# Altium PCB placa_asier_v1.PcbDoc
Units mm, origin at the board's own origin, x right, y up, seen from the top; angles counter-clockwise.
Board outline 38.6 x 33.2 mm, 2 copper layers (Top Layer, Bottom Layer); 40 components, 24 nets, 107 pads, 7 vias.
Unrouted connection lines stored in the file: 3.
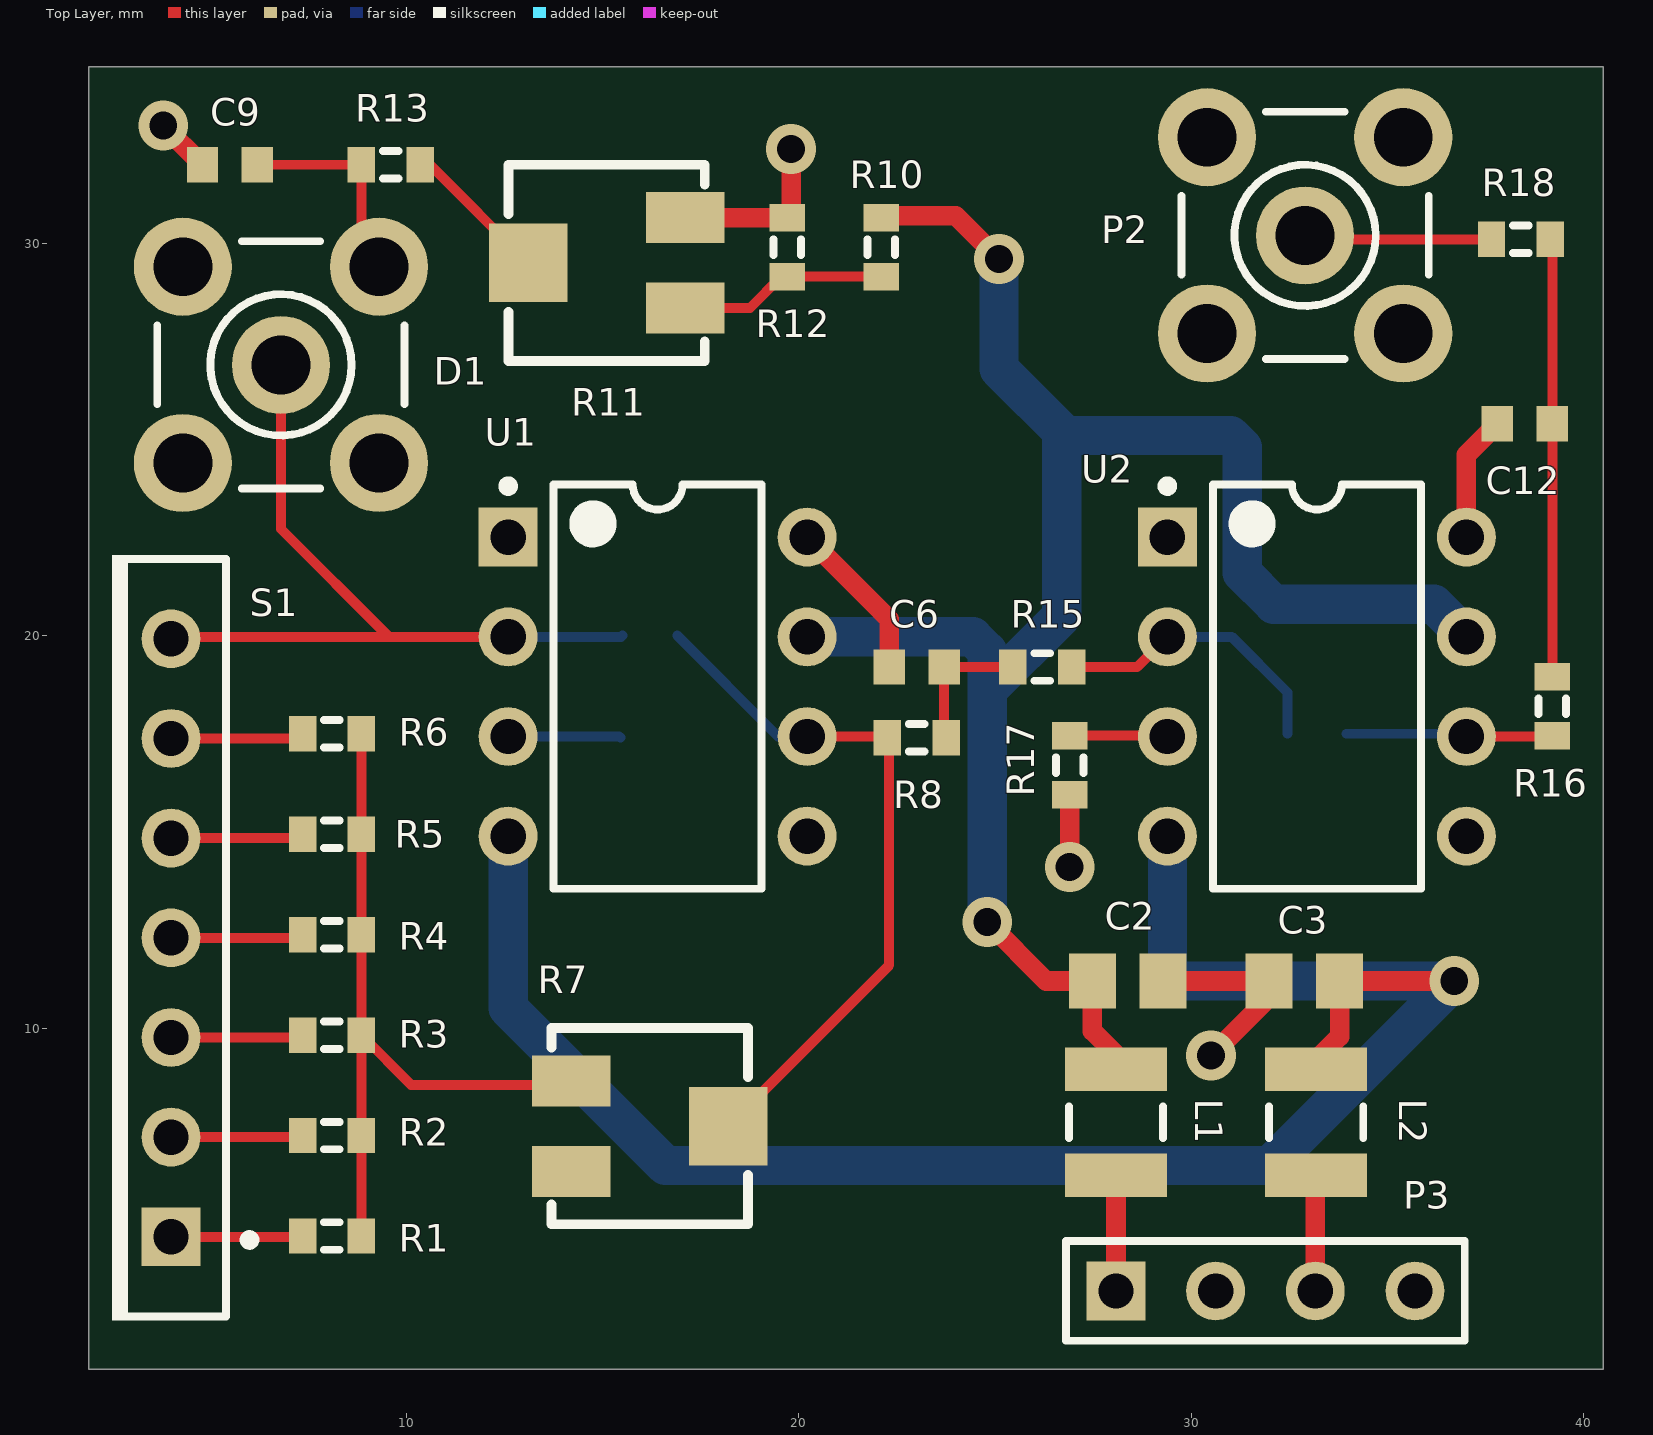
[diagram p0: Top Layer view]
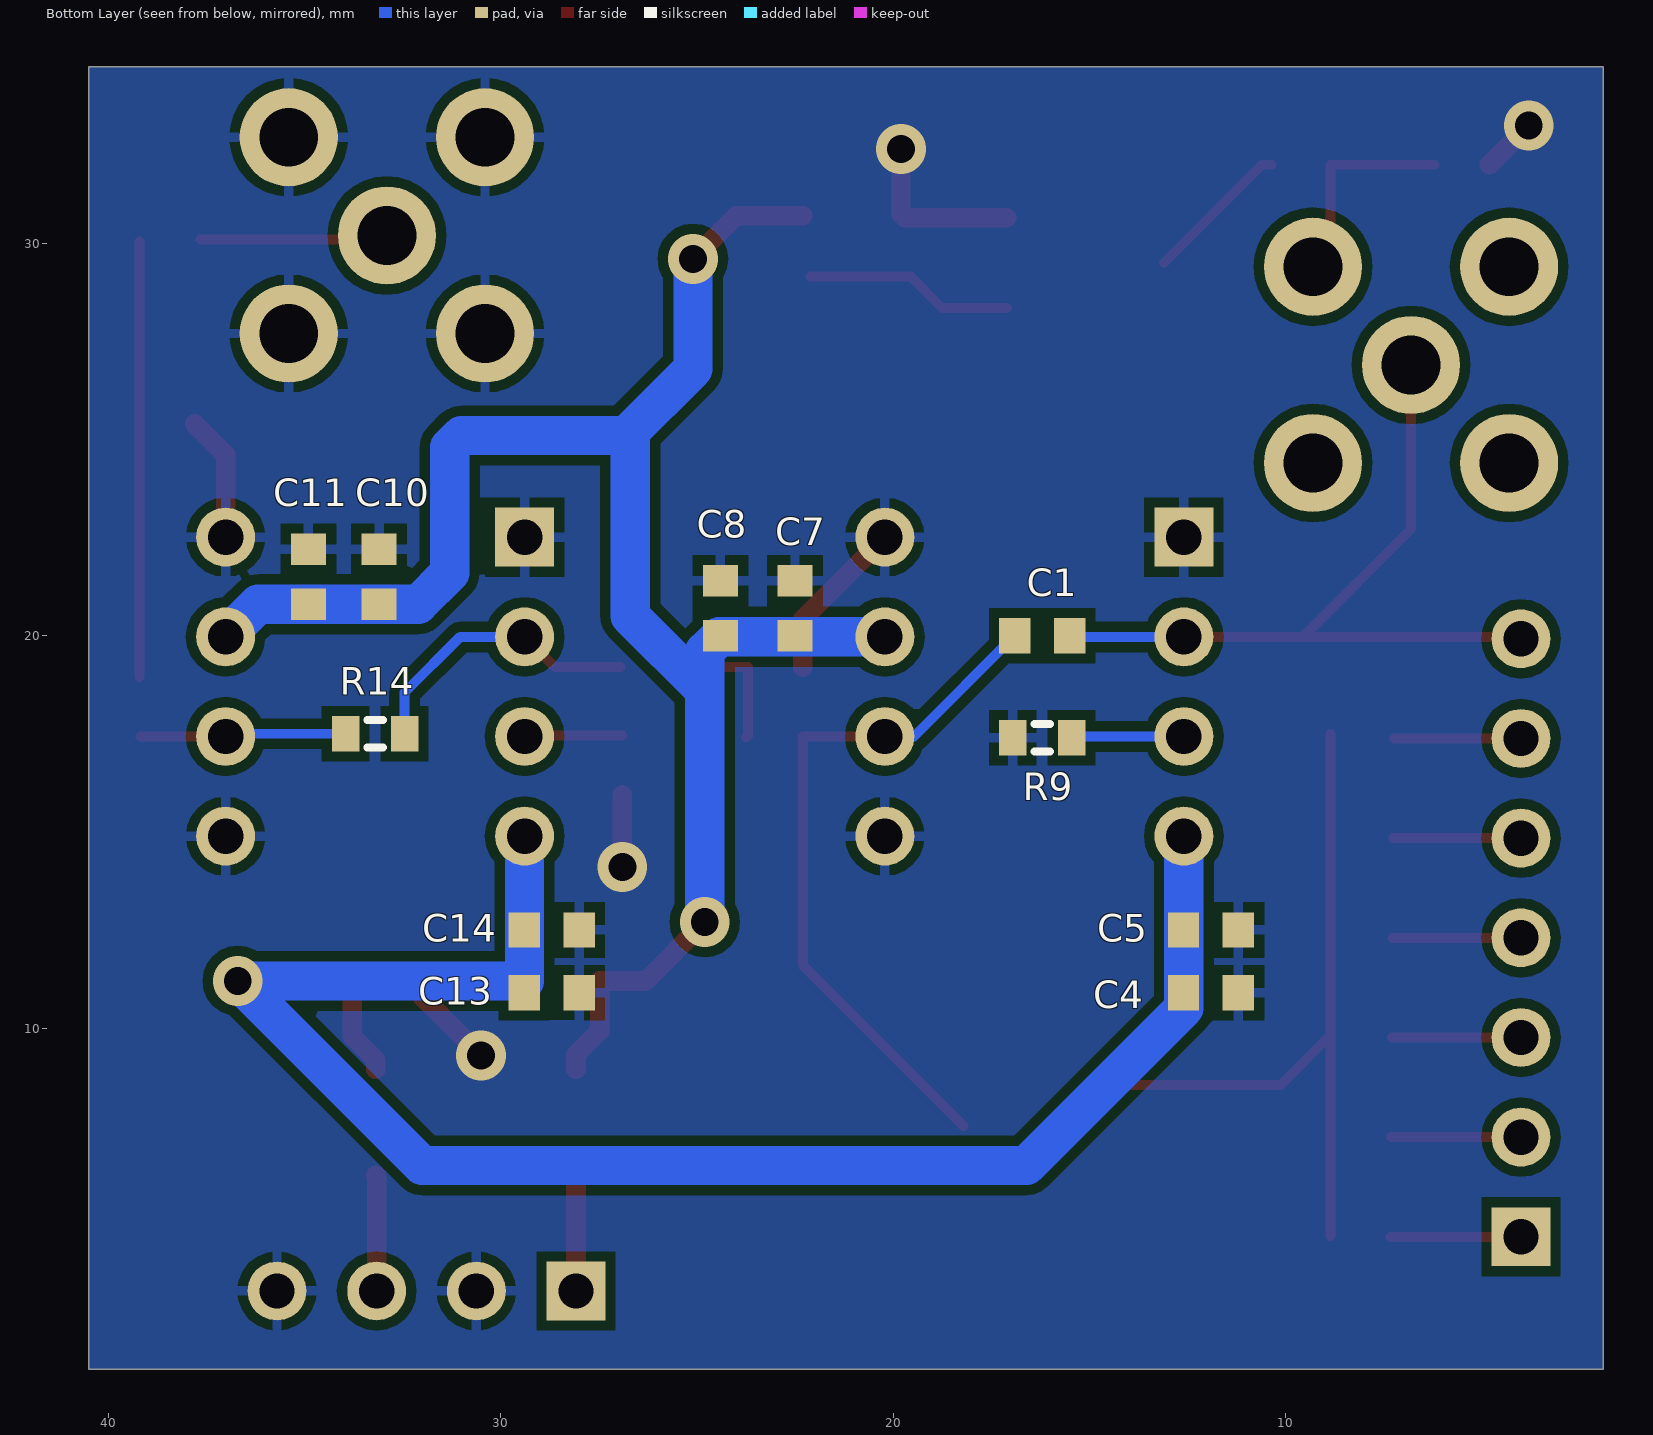
[diagram p1: Bottom Layer view, seen from below]

## Layer stack, top to bottom
Top Solder: solder mask 0.0102, Solder Resist, Dk 3.5
Top Layer: signal copper 0.0356
Dielectric1: dielectric 0.32, FR-4, Dk 4.8
Bottom Layer: signal copper 0.0356
Bottom Solder: solder mask 0.0102, Solder Resist, Dk 3.5

## Board outline
1.9,1.3 1.9,34.5 40.5,34.5 40.5,1.3

## Design rules (kind name [scope] priority, off if disabled: settings)
Clearance [All] p1: gap=0.254
HoleSize [All] p1: absolutevalues=TRUE maxlimit=3.5 minlimit=0.025 maxpercent=80.000 minpercent=20.000
MinimumSolderMaskSliver MinimumSolderMaskSliver_1 [InComponent('U1')] p1: minsoldermaskwidth=0.05
MinimumSolderMaskSliver [All] p2: minsoldermaskwidth=0.254
PolygonConnect [All] p1: connectstyle=Relief reliefconductorwidth=0.254 reliefentries=4 polygonreliefangle="90 Angle" airgapwidth=0.254
RoutingVias [All] p1: holewidth=0.711 width=1.27 viastyle="Through Hole" minholewidth=0.3 minwidth=0.5 maxholewidth=0.711 maxwidth=1.27
SilkToSolderMaskClearance SilkscreenOverComponentPads_1 [All vs (HasFootprint('J1-0603')   OR HasFootprint('POT4MM-2'))] p1: minsilkscreentomaskgap=0.02 clearancetoexposedcopper=TRUE
SilkToSolderMaskClearance SilkscreenOverComponentPads [IsPad] p2: minsilkscreentomaskgap=0.254 clearancetoexposedcopper=TRUE
SolderMaskExpansion SolderMaskExpansion_1 [InComponent('U1')] p1: expansion=0.05
SolderMaskExpansion [All] p2: expansion=0.102
Width Width_1 [(InNet('-12V') OR InNet('+12V') OR InNet('GND')OR InNet('+12V_IN')OR InNet('-12V_IN'))] p1: maxlimit=1 minlimit=0.5 preferedwidth=1 toplayer_maxwidth=0.5 toplayer_prefwidth=0.5 minimp=50.000000 maximp=50.000000 favimp=50.000000
Width [All] p2: maxlimit=0.254 minlimit=0.254 preferedwidth=0.254
27 further rules are at their usual default settings.

## Components (designator, comment, footprint, x,y, rotation, side; value= is the part's Value field where it differs from the comment)
C1 "Cap" 1608[0603] 16.2,20 r180 bottom
C2 "Cap" 6-0805_N 28.38,11.2 r0 top
C3 "Cap" 6-0805_N 32.88,11.2 r0 top
C4 "Cap" 1608[0603] 11.9,10.9 r180 bottom
C5 "Cap Pol" 1608[0603] 11.9,12.5 r0 bottom
C6 "Cap" 1608[0603] 23,19.2 r180 top
C7 "Cap Pol" 1608[0603] 22.5,20.7 r90 bottom
C8 "Cap" 1608[0603] 24.4,20.7 r90 bottom
C9 "Cap" 1608[0603] 5.5,32 r0 top
C10 "Cap" 1608[0603] 33.1,21.5 r90 bottom
C11 "Cap Pol" 1608[0603] 34.9,21.5 r90 bottom
C12 "Cap" 1608[0603] 38.5,25.4 r180 top
C13 "Cap Pol" 1608[0603] 28.7,10.9 r0 bottom
C14 "Cap" 1608[0603] 28.7,12.5 r180 bottom
D1 "SMA" SMB_V-RJ45 6.8,26.9 r0 top
L1 "Inductor" C1210 28.08,7.6 r90 top
L2 "Inductor" C1210 33.18,7.6 r90 top
P2 "SMA" SMB_V-RJ45 32.9,30.2 r0 top
P3 "Header 4" HDR1X4 28.08,3.3 r0 top
R1 "Res3" J1-0603 8.1,4.7 r180 top
R2 "Res3" J1-0603 8.1,7.26 r180 top
R3 "Res3" J1-0603 8.1,9.82 r180 top
R4 "Res3" J1-0603 8.1,12.38 r180 top
R5 "Res3" J1-0603 8.1,14.94 r180 top
R6 "Res3" J1-0603 8.1,17.5 r180 top
R7 "1M" POT4MM-2 16.2,7.5 r0 top
R8 "Res3" J1-0603 23,17.4 r0 top
R9 "Res3" J1-0603 16.2,17.4 r180 bottom
R10 "Res3" J1-0603 22.1,29.9 r90 top
R11 "1K" POT4MM-2 15.1,29.5 r180 top
R12 "Res3" J1-0603 19.7,29.9 r270 top
R13 "Res3" J1-0603 9.6,32 r0 top
R14 "Res3" J1-0603 33.2,17.5 r0 bottom
R15 "Res3" J1-0603 26.2,19.2 r0 top
R16 "Res3" J1-0603 39.2,18.2 r90 top
R17 "Res3" J1-0603 26.9,16.7 r90 top
R18 "Res3" J1-0603 38.4,30.1 r180 top
S1 "SW-6WAY" SW-7 4,12.3 r90 top
U1 "LM741J/883" J08A 16.4,18.7 r0 top
U2 "LM741J/883" J08A 33.2,18.7 r0 top

## Footprints (in the part's own frame and the unit in brackets; to place one, negate y for a bottom-side part, rotate by r counter-clockwise, add the part's x,y. Pads: shape width x height; smd on the part's side, far side on the other; paste and mask are expansions set on the pad)
6-0805_N [mm] "Chip Resistor, Body 2.0x1.2mm, IPC Medium Density"
  rect 1.2x1.4 smd: 1(-0.9,0) 2(0.9,0)
  body extent -1.07,-0.7 1.07,0.7, height 0.7
1608[0603] [mm] "Chip Capacitor, Body 1.6x0.8mm, IPC High Density"
  rect 0.8x0.9 smd: 1(-0.7,0) 2(0.7,0)
  body extent -0.87,-0.48 0.87,0.48, height 1.3
C1210 [mm] "Chip Capacitor, Body 3.2x2.5mm, IPC High Density"
  rect 1.1x2.6 smd: 1(-1.35,0) 2(1.35,0)
  silkscreen extent -0.4,-1.2 0.4,1.2, body extent -1.7,-1.35 1.7,1.35, height 1.3
HDR1X4 [mm] "Connector; Header; 4 Position"
  rect 1.5x1.5 hole 0.9: 1(0,0)
  round 1.5 hole 0.9: 2(2.54,0) 3(5.08,0) 4(7.62,0)
  silkscreen extent -1.27,-1.27 8.89,1.27
J1-0603 [mm] "Chip Resistor, Body 1.6x0.8mm, IPC High Density"
  rect 0.7x0.9 smd: 1(-0.75,0) 2(0.75,0)
  silkscreen extent -0.2,-0.35 0.2,0.35, body extent -0.85,-0.48 0.85,0.48, height 0.9
J08A [mm] "DIP, 8-Pin, Row Spacing 7.62 mm, Pitch 2.54 mm"
  rect 1.5x1.5 hole 0.9: 1(-3.81,3.81)
  round 1.5 hole 0.9: 2(-3.81,1.27) 3(-3.81,-1.27) 4(-3.81,-3.81) 5(3.81,-3.81) 6(3.81,-1.27) 7(3.81,1.27) 8(3.81,3.81)
  silkscreen extent -3.93,-5.15 2.65,5.23, body extent -3.6,-5.15 3.6,5.15, height 5.33
POT4MM-2 [mm] "Square Trimming Potentiometer"
  rect 2x1.3 smd: CCW(-2,-1.15) CW(-2,1.15)
  rect 2x2 smd: W(2,0)
  silkscreen extent -2.5,-2.5 2.5,2.5
SMB_V-RJ45 [mm] "Connector; SMB Straight"
  round 2.5 hole 1.5: 1(0,0) 2(-2.5,-2.5) 2(-2.5,2.5) 2(2.5,-2.5) 2(2.5,2.5)
  silkscreen extent -3.15,-3.15 3.15,3.15
SW-7 [mm] "Switch; 7 Leads"
  rect 1.5x1.5 hole 0.9: 1(-7.62,0)
  round 1.5 hole 0.9: 2(-5.08,0) 3(-2.54,0) 4(0,0) 5(2.54,0) 6(5.08,0) 7(7.62,0)
  silkscreen extent -9.75,-2.13 9.75,1.5

## Part data
C1 C4 C6 C8 C9 C10 C12 C14: library part "Cap Semi", "Capacitor (Semiconductor SIM Model)"
C2 C3: "Capacitor"
C5 C7 C11 C13: library part "Cap Pol3", "Polarized Capacitor (Surface Mount)"
D1 P2: library part SMB, "SMB Straight Connector"
P3: "Header, 4-Pin"
R1 R2 R3 R4 R5 R6 R8 R9 R10 R12 R13 R14 R15 R16 R17 R18: "Resistor"
R7 R11: library part "RPot SM", "Square Trimming Potentiometer"
S1: "6 Way Switch"
U1 U2: library part CMP-0055-00144-1, "Operational Amplifier, 8-pin CerDIP"

## Via types
v1: diameter 1.27, hole 0.711, Top Layer to Bottom Layer, 7 vias

## Nets (pads, with @x,y where several pads share a name; then routed paths per layer and width w, separated by ;. In a path a pad name is that pad's centre, name@x,y a point inside that pad or via, vN(x,y) a via of type N, cw(c..) or ccw(c..) an arc to the next point about the centre after c; other vN are vias at no path point)
+12V: C2.1 C7.1 C8.1 C10.1 C11.1 L1.2 R10.2 U1.7 U2.7 | length 48.7
  Top Layer w0.5: R10.2@22.3,30.7 24,30.7 v1(25.1,29.6) ; v1(24.8,12.7) 26.3,11.2 C2.1 ; 27.48,10 C2.1 ; L1.2 28.08,9.32 27.48,9.92 C2.1
  Bottom Layer w1: U1.7 24.43,19.97 24.8,19.6 24.8,18.6 ; v1(24.8,12.7) 24.8,18.6 ; v1(25.1,29.6) 25.1,26.8 26.8,25.1 31,25.1 31.3,24.8 31.3,21.6 32.1,20.8 C10.1 36.18,20.8 U2.7 ; 26.7,25.2 26.7,20.5 24.8,18.6
+12V_IN: L1.1 P3.1 | length 2.9
  Top Layer w0.5: P3.1 L1.1
-12V: C3.2 C4.1 C5.2 C13.2 C14.1 L2.2 U1.4 U2.4 | length 48.5
  Top Layer w0.5: L2.2 33.18,9.18 33.78,9.78 C3.2 v1(36.7,11.2)
  Bottom Layer w1: U1.4 12.59,10.51 16.6,6.5 32,6.5 v1(36.7,11.2) 29.39,11.2 U2.4
-12V_IN: L2.1 P3.3 | length 3
  Top Layer w0.5: P3.3 33.16,6.23 L2.1
GND: C2.2 C3.1 C4.2 C5.1 C6.2 C7.2 C8.2 C9.1 C10.2 C11.2 C12.2 C13.1 C14.2 P2.2 P3.2 P3.4 R9.1 R11.CCW R12.1 R17.1 U1.1 U1.5 U1.8 U2.1 U2.5 U2.8 | length 20.3
  Top Layer w0.5: v1(3.8,33) C9.1 ; R11.CCW R12.1 19.8,30.75 v1(19.8,32.4) ; U1.8 22.3,20.42 C6.2 ; v1(26.9,14.1) R17.1 ; C2.2 C3.1 31.98,10.78 v1(30.5,9.3) ; U2.8 37.01,24.61 C12.2
NetC1_1: C1.1 R7.W R8.1 U1.6 | length 18.1
  Top Layer w0.254: R7.W 22.3,11.6 22.3,17.43 U1.6
  Bottom Layer w0.254: C1.1 19.47,17.43 U1.6
NetC1_2: C1.2 D1.1 S1.7 U1.2 | length 19.7
  Top Layer w0.254: S1.7 4.05,19.97 9.55,19.97 ; D1.1@6.8,27 D1.1 6.8,22.72 9.55,19.97 ; U1.2 9.55,19.97
  Bottom Layer w0.254: U1.2 15.47,19.97 C1.2
NetC6_1: C6.1 R8.2 R15.1 | length 3.6
  Top Layer w0.254: R8.2 23.7,17.45 C6.1 R15.1
NetC9_2: C9.2 D1.2 R13.1 | length 5.4
  Top Layer w0.254: C9.2 R13.1 8.85,29.85 D1.2@9.3,29.4
NetC12_1: C12.1 R16.2 R18.1 | length 11.1
  Top Layer w0.254: R16.2 C12.1 R18.1@39.2,30.05
NetP2_1: P2.1 R18.2 | length 5.8
  Top Layer w0.254: P2.1@31.8,30.1 R18.2
NetR1_1: R1.1 R2.1 R3.1 R4.1 R5.1 R6.1 R7.CW | length 18.7
  Top Layer w0.254: R1.1 R2.1 R3.1 ; R6.1 R5.1 R4.1 R3.1 ; R7.CW@14.2,8.55 10.12,8.55 R3.1
NetR1_2: R1.2 S1.1 | length 3.3
  Top Layer w0.254: S1.1 R1.2@7.33,4.68
NetR2_2: R2.2 S1.2 | length 3.3
  Top Layer w0.254: S1.2 R2.2@7.31,7.22
NetR3_2: R3.2 S1.3 | length 3.3
  Top Layer w0.254: S1.3 R3.2@7.29,9.76
NetR4_2: R4.2 S1.4 | length 3.3
  Top Layer w0.254: S1.4 R4.2@7.27,12.3
NetR5_2: R5.2 S1.5 | length 3.3
  Top Layer w0.254: S1.5 R5.2@7.25,14.84
NetR6_2: R6.2 S1.6 | length 3.2
  Top Layer w0.254: S1.6 R6.2@7.23,17.38
NetR9_2: R9.2 U1.3 | length 2.9
  Bottom Layer w0.254: U1.3 15.42,17.43 R9.2
NetR10_1: R10.1 R11.CW R12.2 | length 5.3
  Top Layer w0.254: R11.CW 18.75,28.35 19.55,29.15 R12.2 R10.1
NetR11_W: R11.W R13.2 | length 3.8
  Top Layer w0.254: R13.2 10.6,32 R11.W
NetR14_1: R14.1 R15.2 U2.2 | length 7.5
  Top Layer w0.254: R15.2 28.62,19.2 U2.2
  Bottom Layer w0.254: U2.2 31.03,19.97 32.45,18.55 R14.1
NetR14_2: R14.2 R16.1 U2.6 | length 5.3
  Top Layer w0.254: U2.6 R16.1@39.18,17.43
  Bottom Layer w0.254: R14.2 36.94,17.5 U2.6
NetR17_2: R17.2 U2.3 | length 2.5
  Top Layer w0.254: R17.2 U2.3@29.37,17.45
pads on no net: R7.CCW

## Polygon pours and split planes (outlines as drawn)
GND on Bottom Layer "BotGnd" (solid, remove dead copper, pour order 0): 1.9,34.5 1.9,1.3 40.5,1.3 40.5,34.5

## Silkscreen, mask and mechanical layers (free items; w line width, h text height)
Mechanical 13:
  the board outline again, w0.254